# Altium PCB SimpleMonitorUSBAER.PCBDOC
Units mm, origin at the board's own origin, x right, y up, seen from the top; angles counter-clockwise.
Board outline 91.44 x 22.86 mm, 2 copper layers (Top Layer, Bottom Layer); 11 components, 29 nets, 122 pads, 24 vias.
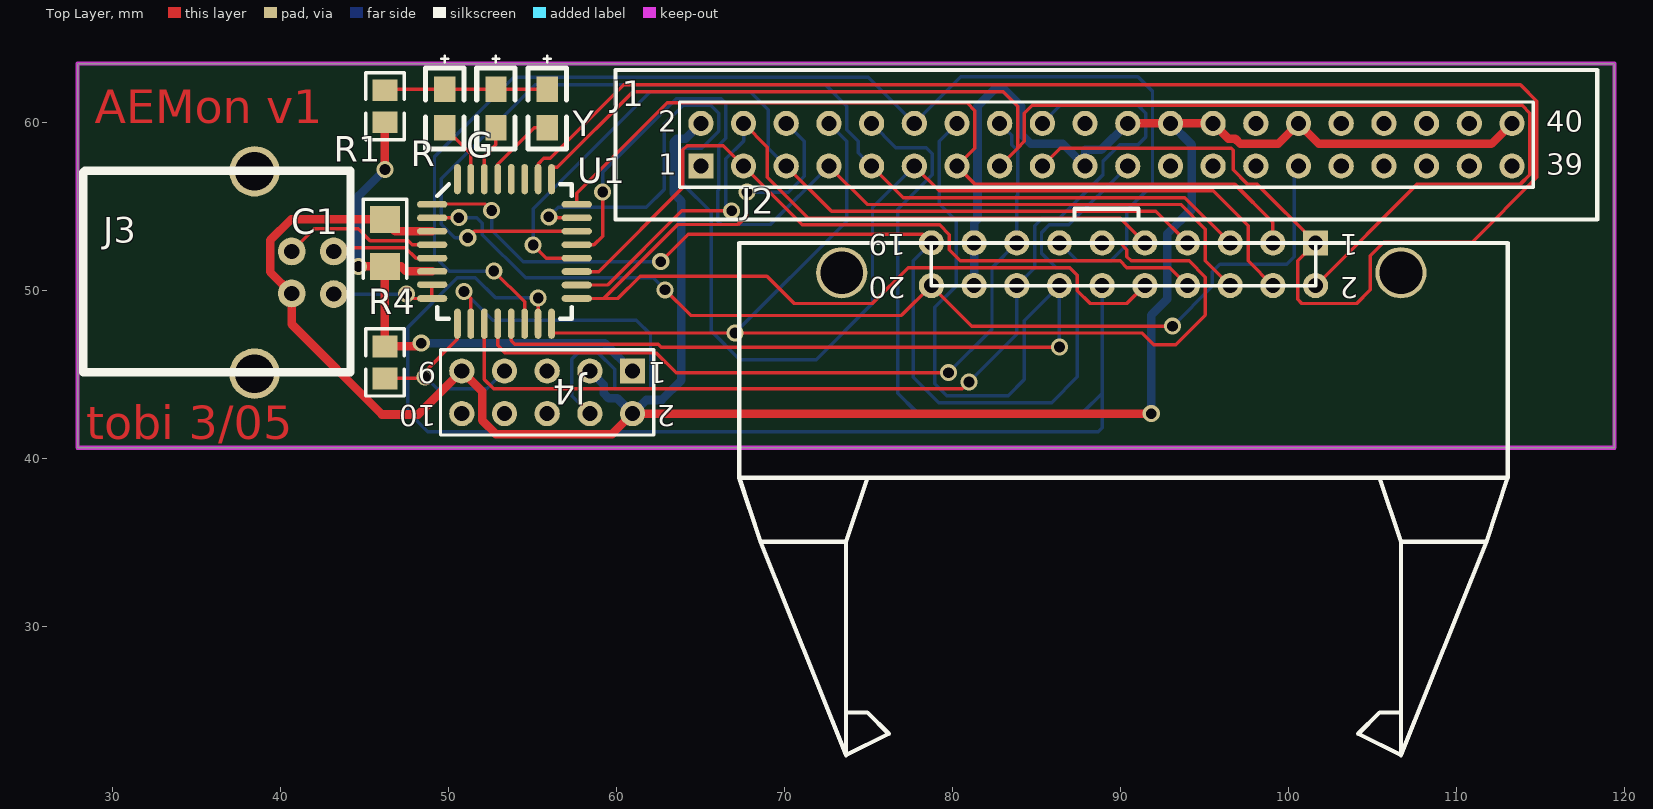
[diagram p0: Top Layer view]
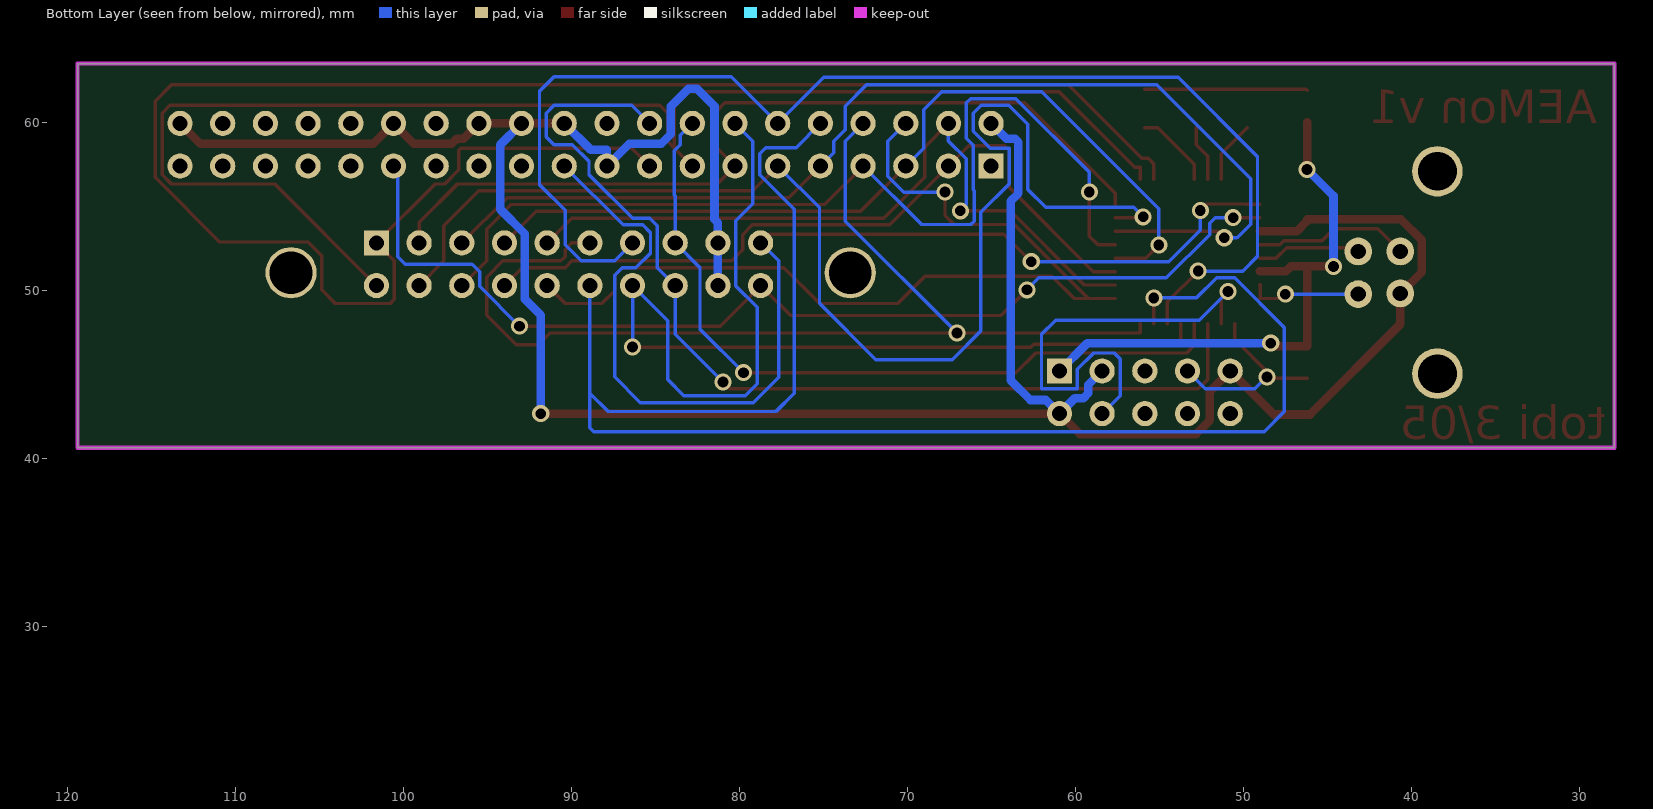
[diagram p1: Bottom Layer view, seen from below]

## Layer stack, top to bottom
Top Layer: signal copper 0.0356
Dielectric: dielectric 0.32, FR-4, Dk 4.8
Bottom Layer: signal copper 0.0356

## Board outline
27.94,40.64 27.94,63.5 119.38,63.5 119.38,40.64

## Design rules (kind name [scope] priority, off if disabled: settings)
Clearance [All] p1: gap=0.203
ComponentClearance [All] p1: gap=0.254 collisioncheckmode=0
PolygonConnect [All] p1: connectstyle=Relief reliefconductorwidth=0.254 reliefentries=4 polygonreliefangle="90 Angle"
RoomDefinition SimpleMonitorUSBAER [InComponentClass('SimpleMonitorUSBAER')] p1: confinementstyle=ConfineIn formatcopy=TRUE outline 0,0 142.24,0 142.24,96.774 0,96.774
RoutingLayers [All] p1: top layer=Horizontal bottom layer=Vertical
RoutingVias [All] p1: holewidth=0.635 width=1.016 viastyle="Through Hole" minholewidth=0.711 minwidth=1.27 maxholewidth=0.711 maxwidth=1.27
SolderMaskExpansion [All] p1: expansion=0.102
TestPointUsage [All] p1: valid=0 allowmultiple=FALSE
Testpoint [All] p1: side=15 testpointundercomponent=TRUE minsize=1.016 maxsize=2.54 preferedsize=1.524 minholesize=0 maxholesize=1.016 preferedholesize=0.813 testpointgrid=0.025 style=1023 order=-539222988
Width "Schematic Width Constraint" [InNet('VDD')] p1: maxlimit=1.524 minlimit=0.254 preferedwidth=0.508
Width "Schematic Width Constraint" [InNet('GND')] p2: maxlimit=1.524 minlimit=0.254 preferedwidth=0.508
Width [All] p3: maxlimit=0.203 minlimit=0.203 preferedwidth=0.203
16 further rules are at their usual default settings.

## Components (designator, comment, footprint, x,y, rotation, side; value= is the part's Value field where it differs from the comment)
C1 "100nF" CC3216-1206 46.228,52.832 r270 top
G "LED" 0805LED 55.88,61.976 r270 top
J1 "CAVIAR" "HDR2X20 with shell" 65.024,57.404 r0 top
J2 "AER-Rome" "HDR10x2 w/clips" 101.6,52.832 r180 top
J3 "USB B" usb 43.18,52.324 r270 top
J4 "Debug" HDR2X5 60.96,45.212 r180 top
R "LED" 0805LED 49.784,61.976 r270 top
R1 "471" CR2012-0805 46.228,60.96 r90 top
R4 "102" CR2012-0805 46.228,45.72 r270 top
U1 "C8051F320" TQFP32 53.34,52.324 r0 top
Y "LED" 0805LED 52.832,61.976 r270 top

## Footprints (in the part's own frame and the unit in brackets; to place one, negate y for a bottom-side part, rotate by r counter-clockwise, add the part's x,y. Pads: shape width x height; smd on the part's side, far side on the other; paste and mask are expansions set on the pad)
0805LED [mil]
  rect 60x50 smd: +(0,0) -(90,0)
  silkscreen extent -79,-45 140,45
CC3216-1206 [mm]
  rect 1.6x1.8 smd: 1(-1.4,0) 2(1.4,0)
  silkscreen extent -2.6,-1.3 2.1,1.3
CR2012-0805 [mm]
  rect 1.3x1.5 smd: 1(-0.95,0) 2(0.95,0)
  silkscreen extent -2,-1.15 2,1.15
HDR2X5 [mm] "Connector; Header; 5x2 Position"
  rect 1.5x1.5 hole 0.9: 1(0,0)
  round 1.5 hole 0.9: 2(0,2.54) 3(2.54,0) 4(2.54,2.54) 5(5.08,0) 6(5.08,2.54) 7(7.62,0) 8(7.62,2.54) 9(10.16,0) 10(10.16,2.54)
  silkscreen extent -1.27,-1.27 11.43,3.81
"HDR2X20 with shell" [mm] "IDC 40 with PCB plastic shell"
  rect 1.5x1.5 hole 0.9: 1(0,0)
  round 1.5 hole 0.9: 2(0,2.54) 3(2.54,0) 4(2.54,2.54) 5(5.08,0) 6(5.08,2.54) 7(7.62,0) 8(7.62,2.54) 9(10.16,0) 10(10.16,2.54) 11(12.7,0) 12(12.7,2.54) 13(15.24,0) 14(15.24,2.54) 15(17.78,0) 16(17.78,2.54) 17(20.32,0) 18(20.32,2.54) 19(22.86,0) 20(22.86,2.54) 21(25.4,0) 22(25.4,2.54) 23(27.94,0) 24(27.94,2.54) 25(30.48,0) 26(30.48,2.54) 27(33.02,0) 28(33.02,2.54) 29(35.56,0) 30(35.56,2.54) 31(38.1,0) 32(38.1,2.54) 33(40.64,0) 34(40.64,2.54) 35(43.18,0) 36(43.18,2.54) 37(45.72,0) 38(45.72,2.54) 39(48.26,0) 40(48.26,2.54)
  silkscreen extent -5.08,-3.17 53.34,5.71
"HDR10x2 w/clips" [mm] "10x2 IDC header with clips"
  rect 1.5x1.5 hole 0.9: 1(0,0)
  round 1.5 hole 0.9: 2(0,2.54) 3(2.54,0) 4(2.54,2.54) 5(5.08,0) 6(5.08,2.54) 7(7.62,0) 8(7.62,2.54) 9(10.16,0) 10(10.16,2.54) 11(12.7,0) 12(12.7,2.54) 13(15.24,0) 14(15.24,2.54) 15(17.78,0) 16(17.78,2.54) 17(20.32,0) 18(20.32,2.54) 19(22.86,0) 20(22.86,2.54)
  round 3.048 hole 2.54: ""(-5.08,1.778) ""(28.194,1.778)
  silkscreen extent -11.43,0 34.29,30.48
TQFP32 [mm]
  oval 1.8x0.4 smd: 1(-4.3,2.8) 2(-4.3,2) 3(-4.3,1.2) 4(-4.3,0.4) 5(-4.3,-0.4) 6(-4.3,-1.188) 7(-4.3,-1.975) 8(-4.3,-2.8) 17(4.3,-2.8) 18(4.3,-2) 19(4.3,-1.2) 20(4.3,-0.4) 21(4.3,0.4) 22(4.3,1.2) 23(4.3,2) 24(4.3,2.8)
  oval 0.4x1.8 smd: 9(-2.8,-4.3) 10(-2,-4.3) 11(-1.2,-4.3) 12(-0.4,-4.3) 13(0.4,-4.3) 14(1.2,-4.3) 15(2,-4.3) 16(2.8,-4.3) 25(2.8,4.3) 26(2,4.3) 27(1.2,4.3) 28(0.4,4.3) 29(-0.4,4.3) 30(-1.2,4.3) 31(-2,4.3) 32(-2.8,4.3)
  silkscreen extent -4,-4 4,4
usb [mm]
  round 1.651 hole 0.9: 1(2.54,0) 2(0,0) 3(0,-2.5) 4(2.5,-2.5)
  round 3 hole 2.3: 5(-4.77,-4.71) 5(7.27,-4.71)
  silkscreen extent -4.8,-14.9 7.2,1

## Part data
C1: library part CAPCHIP
G R Y: "LED, SMT 3mm by 1.5mm"
J1: library part "CAVIAR 40 IDC", "CAVIAR 40 pin IDC header"
J2: library part "Header AER-ROME", "AER-Rome 20-Pin, Dual row, with IDC mounting clips"
J3: library part USB, "USB TypB"
J4: library part "Header 5X2", "Header, 5-Pin, Dual row"
R1 R4: library part RES1
U1: "Silicon Labs USB Microcontroller"

## Via types
v1: diameter 1.016, hole 0.635, Top Layer to Bottom Layer, 24 vias

## Nets (pads, with @x,y where several pads share a name; then routed paths per layer and width w, separated by ;. In a path a pad name is that pad's centre, name@x,y a point inside that pad or via, vN(x,y) a via of type N, cw(c..) or ccw(c..) an arc to the next point about the centre after c; other vN are vias at no path point)
/RST/C2CK: J4.7 R4.2 U1.9 | length 12.1
  Top Layer w0.203: R4.2 v1@48.224,44.77 ; v1(48.616,44.856) 48.529,44.77 v1@48.224,44.77 ; U1.9 50.54,47.086 48.463,45.009 v1@48.224,44.77
  Bottom Layer w0.203: v1(48.616,44.856) 49.327,44.145 52.273,44.145 J4.7
ACK: J1.29 J2.20 U1.2 | length 63.7
  Top Layer w0.203: U1.2 50.616,54.324 v1(50.622,54.331) ; v1(62.89,50.038) 64.414,48.514 76.962,48.514 J2.20 81.153,47.879 v1(93.091,47.879)
  Bottom Layer w0.203: v1(50.622,54.331) 51.689,54.331 52.019,54 52.019,53.327 54.597,50.749 62.179,50.749 v1(62.89,50.038) ; v1(93.091,47.879) 95.453,50.241 95.453,51.105 95.91,51.562 99.873,51.562 100.33,52.019 100.33,57.404 J1.29
AE0: J1.17 J2.1 U1.26 | length 109.3
  Top Layer w0.203: U1.26 55.34,57.524 55.677,57.861 56.058,57.861 60.427,62.23 113.792,62.23 114.757,61.265 114.757,56.728 110.912,52.883 105.664,52.883 104.851,52.07 104.851,50.038 104.038,49.225 100.787,49.225 100.533,49.479 100.533,51.765 J2.1 98.095,56.337 97.536,56.337 96.698,57.175 96.698,58.344 96.571,58.471 86.411,58.471 J1.17
AE1: J1.15 J2.2 U1.25 | length 86.5
  Top Layer w0.203: U1.25 56.14,57.328 56.49,57.328 60.985,61.824 83.007,61.824 83.871,60.96 83.871,58.471 ; J1.15 83.871,58.471 ; J2.2 107.645,56.337 113.792,56.337 114.351,56.896 114.351,60.554 113.894,61.011 84.734,61.011 84.277,60.554 84.277,58.877 83.871,58.471
AE2: J1.13 J2.3 U1.24 | length 51.9
  Top Layer w0.203: U1.24 57.633,55.124 57.633,55.778 63.017,61.163 80.874,61.163 81.331,60.706 81.331,58.471 J1.13 81.331,56.337 96.774,56.337 99.06,54.051 J2.3
AE3: J1.11 J2.4 U1.23 | length 78.6
  Top Layer w0.203: v1(55.982,54.381) 56.039,54.324 U1.23 ; J1.11 79.197,55.931 95.504,55.931 97.587,53.848 97.587,51.765 J2.4
  Bottom Layer w0.203: v1(55.982,54.381) 56.54,54.94 61.773,54.94 62.84,56.007 62.84,59.881 63.969,61.011 65.622,61.011 66.091,60.542 66.091,59.487 65.075,58.471 63.957,58.471 63.957,56.337 65.634,54.661 65.634,47.588 67.349,45.872 71.882,45.872 75.235,49.225 75.235,54.915 J1.11
AE4: J1.9 J2.5 U1.22 | length 65.6
  Top Layer w0.203: v1(51.156,53.137) 51.543,53.524 U1.22 ; J1.9 77.064,55.524 93.828,55.524 J2.5
  Bottom Layer w0.203: v1(51.156,53.137) 50.394,53.137 49.581,53.95 49.581,56.642 55.169,62.23 72.441,62.23 73.711,60.96 73.711,59.563 74.397,58.877 74.397,58.191 J1.9
AE5: J1.7 J2.6 U1.21 | length 58.1
  Top Layer w0.203: U1.21 58.668,52.724 59.182,53.238 v1(59.182,55.855) ; J1.7 74.93,55.118 93.574,55.118 95.047,53.645 95.047,51.765 J2.6
  Bottom Layer w0.203: v1(59.182,55.855) 59.182,57.048 63.551,61.417 66.243,61.417 66.497,61.163 66.497,59.055 66.091,58.649 66.091,55.982 66.04,55.931 66.04,54.127 66.243,53.924 69.164,53.924 J1.7
AE6: J1.5 J2.7 U1.20 | length 52
  Top Layer w0.203: v1(55.042,52.705) 55.823,51.924 U1.20 ; J1.5 72.796,54.712 92.1,54.712 J2.7
  Bottom Layer w0.203: v1(55.042,52.705) 55.042,54.864 62.001,61.824 67.97,61.824 69.037,60.757 69.037,58.471 J1.5
AE7: J1.3 J2.8 U1.19 | length 44.7
  Top Layer w0.203: U1.19 58.953,51.124 63.957,56.128 63.957,58.369 64.211,58.623 66.345,58.623 J1.3 71.069,53.899 79.236,53.899 79.807,53.328 79.807,52.426 80.467,51.765 89.967,51.765 90.373,51.359 92.913,51.359 J2.8
AE8: J1.4 J2.9 U1.18 | length 44.7
  Top Layer w0.203: U1.18 59.468,50.324 63.881,54.737 v1(66.853,54.737) ; J1.4 68.986,58.522 68.986,56.744 71.425,54.305 89.967,54.305 J2.9
  Bottom Layer w0.203: v1(66.853,54.737) 66.497,55.093 66.497,57.829 67.564,58.896 J1.4
AE9: J1.6 J2.10 U1.17 | length 57.1
  Top Layer w0.203: U1.17 59.252,49.524 ; v1(67.767,55.855) 67.767,54.458 67.234,53.924 63.652,53.924 59.252,49.524 ; J2.10 90.373,49.225 88.189,49.225 87.427,49.987 87.427,50.902 86.97,51.359 77.368,51.359 75.235,49.225 70.587,49.225 68.961,50.851 61.417,50.851 60.09,49.524 59.252,49.524
  Bottom Layer w0.203: v1(67.767,55.855) 70.231,55.855 71.171,56.794 71.171,58.877 J1.6
AE10: J1.8 J2.11 U1.16 | length 65.6
  Top Layer w0.203: U1.16 56.14,47.473 v1(67.056,47.473) 91.262,47.473 91.973,46.761 93.269,46.761 95.047,48.539 95.047,50.8 94.082,51.765 90.627,51.765 90.373,52.019 90.373,52.426 89.967,52.832 J2.11
  Bottom Layer w0.203: v1(67.056,47.473) 73.711,54.127 73.711,58.877 J1.8
AE11: J1.10 J2.12 U1.15 | length 98.9
  Top Layer w0.203: U1.15 v1(55.34,49.555)
  Bottom Layer w0.203: v1(55.34,49.555) 52.807,49.555 51.613,50.749 50.527,50.749 47.574,47.796 47.574,42.799 48.768,41.605 88.671,41.605 88.9,41.834 88.9,43.891 ; J1.10 76.632,58.496 78.435,58.496 78.791,58.141 78.791,56.896 76.733,54.839 76.733,43.891 77.826,42.799 87.808,42.799 88.9,43.891 ; J2.12 88.9,43.891
AE12: J1.12 J2.13 U1.14 | length 75.6
  Top Layer w0.203: v1(52.705,51.156) 54.54,49.321 U1.14
  Bottom Layer w0.203: v1(52.705,51.156) 50.063,51.156 49.174,52.045 49.174,57.963 53.899,62.687 74.981,62.687 J1.12 80.493,62.713 91.034,62.713 91.897,61.849 91.897,56.286 90.373,54.762 90.373,52.73 89.408,51.765 87.427,51.765 J2.13
AE13: J1.14 J2.14 U1.13 | length 66.8
  Top Layer w0.203: U1.13 53.74,47.022 53.95,46.812 62.484,46.812 62.662,46.634 v1(86.36,46.634)
  Bottom Layer w0.203: J1.14 79.197,58.877 79.197,55.169 80.213,54.153 80.213,50.267 78.943,48.997 78.943,44.45 79.654,43.739 83.312,43.739 84.277,44.704 84.277,48.209 J2.14 v1(86.36,46.634)
AE14: J1.16 J2.15 U1.12 | length 45.8
  Top Layer w0.203: U1.12 52.94,46.736 53.397,46.279 62.382,46.279 63.551,45.11 v1(79.756,45.11)
  Bottom Layer w0.203: v1(79.756,45.11) 82.347,47.701 82.347,51.359 J2.15 83.82,55.626 83.871,55.677 83.871,58.318 83.515,58.674 83.515,59.233 J1.16
AE15: J1.18 J2.16 U1.11 | length 60.9
  Top Layer w0.203: U1.11 52.14,44.704 52.699,44.145 80.569,44.145 v1(80.975,44.552)
  Bottom Layer w0.203: v1(80.975,44.552) 83.82,47.396 J2.16 84.887,51.359 84.887,53.848 85.344,54.305 86.36,54.305 88.951,56.896 88.951,57.681 89.944,58.674 91.034,58.674 91.491,59.131 91.491,60.554 91.034,61.011 86.411,61.011 J1.18
C2D: J4.4 U1.10 | length 27.6
  Top Layer w0.203: v1(50.934,49.936) 51.34,49.53 U1.10
  Bottom Layer w0.203: v1(50.934,49.936) 52.635,48.235 61.189,48.235 62.027,47.396 62.027,44.145 59.893,44.145 59.893,45.314 58.928,46.279 57.709,46.279 57.353,45.923 57.353,43.739 J4.4
D+: J3.3 U1.4 | length 9.3
  Top Layer w0.203: J3.3 42.026,53.67 44.628,53.67 45.339,52.959 47.625,52.959 47.86,52.724 U1.4
D-: J3.2 U1.5 | length 6.2
  Top Layer w0.203: J3.2 43.409,52.553 47.447,52.553 48.076,51.924 U1.5
GND: C1.1 J1.2 J1.19 J1.22 J1.24 J1.26 J1.30 J1.40 J2.17 J2.18 J3.4 J4.2 J4.3 J4.9 U1.3 | length 165.9
  Top Layer w0.508: U1.3 46.831,53.524 46.228,54.127 C1.1 40.64,54.232 39.395,52.987 39.395,51.109 J3.4 40.68,47.991 46.05,42.621 48.209,42.621 J4.9 52.019,43.993 52.019,42.266 52.832,41.453 59.741,41.453 J4.2 v1(91.821,42.672) ; J1.22 J1.24 J1.26 96.418,59.03 96.825,59.03 97.13,58.725 99.365,58.725 J1.30 101.803,58.725 112.065,58.725 J1.40
  Bottom Layer w0.508: J4.3 59.233,44.399 59.233,43.891 59.538,43.586 60.046,43.586 J4.2 61.773,43.485 62.687,43.485 63.856,44.653 63.856,55.321 63.398,55.778 63.398,58.826 63.602,59.03 64.11,59.03 J1.2 ; J2.18 J2.17 81.28,54.026 81.483,54.229 81.483,60.96 82.525,62.001 83.033,62.001 84.074,60.96 84.074,59.309 84.658,58.725 86.563,58.725 J1.19 87.884,58.369 88.849,58.369 J1.22 ; v1(91.821,42.672) 91.821,48.539 92.761,49.479 92.761,53.365 94.234,54.839 94.234,58.674 J1.24
NetG_+: G.+ R1.2 R.+ Y.+ | length 9.7
  Top Layer w0.203: R1.2 46.294,61.976 R.+ Y.+ G.+
NetG_-: G.- U1.29 | length 4.7
  Top Layer w0.203: U1.29 52.94,57.512 55.118,59.69 G.-
NetR_-: R.- U1.31 | length 3.7
  Top Layer w0.203: R.- 51.34,58.134 U1.31
NetU1_30: U1.30 Y.- | length 3.4
  Top Layer w0.203: U1.30 52.14,57.982 52.832,58.674 Y.-
REQ: J1.21 J2.19 U1.1 | length 68.9
  Top Layer w0.203: U1.1 49.809,55.124 49.809,55.143 52.197,55.143 v1(52.578,54.762) ; v1(62.636,51.714) 64.262,53.34 78.232,53.34 J2.19
  Bottom Layer w0.203: v1(52.578,54.762) 52.578,53.594 54.458,51.714 v1(62.636,51.714) ; J2.19 77.673,51.765 77.673,44.831 79.172,43.332 85.903,43.332 87.427,44.856 87.427,50.902 86.97,51.359 86.157,51.359 85.293,52.222 85.293,53.442 85.75,53.899 86.919,53.899 J1.21
VBUS: J3.1 U1.7 U1.8 | length 6.8
  Top Layer w0.203: v1(47.517,49.784) 47.777,49.524 U1.8@49.022,49.524 ; U1.8 U1.8@49.022,49.524 ; U1.7 49.022,50.349 U1.8@49.022,49.524
  Bottom Layer w0.203: J3.1 v1(47.517,49.784)
VDD: C1.2 J4.1 R1.1 R4.1 U1.6 | length 34
  Top Layer w0.508: v1(44.653,51.432) C1.2 ; v1(46.228,57.201) R1.1 ; v1(48.387,46.863) 48.194,46.67 R4.1 C1.2 ; U1.6 47.492,51.136 47.196,51.432 C1.2
  Bottom Layer w0.508: v1(44.653,51.432) 44.653,55.626 v1(46.228,57.201) ; v1(48.387,46.863) 59.309,46.863 J4.1
pads on no net: J1.1 J1.20 J1.23 J1.25 J1.27 J1.28 J1.31 J1.32 J1.33 J1.34 J1.35 J1.36 J1.37 J1.38 J1.39 J2. J3.5 J4.5 J4.6 J4.8 J4.10 U1.27 U1.28 U1.32

## Keep-outs
Keep-Out Layer:
  the board outline again, w0.254

## Other copper
Top Layer:
  text "AEMon v1" at 28.956,59.944 h2
  text "tobi 3/05" at 28.448,41.148 h2

## Silkscreen, mask and mechanical layers (free items; w line width, h text height)
Drill Drawing:
  text ".LEGEND" at 130.81,33.02 h1.52
  text "Drill Drawing." at 130.81,29.21 h1.52

## Dimensions
27.94,40.64 to 119.38,40.64 on Mechanical 1
27.94,40.64 to 27.94,63.5 on Mechanical 1

## Text inside footprints (layer, text, board x,y; h text height)
J1: Top Overlay "39" at 115.316,56.896 h1.27; Top Overlay "40" at 115.316,59.436 h1.27; Top Overlay "2" at 62.484,59.436 h1.27; Top Overlay "1" at 62.484,56.896 h1.27
J2: Top Overlay "20" at 77.216,50.8 h1.27 r180; Top Overlay "19" at 77.216,53.34 h1.27 r180; Top Overlay "1" at 104.14,53.34 h1.27 r180; Top Overlay "2" at 104.14,50.8 h1.27 r180
J4: Top Overlay "2" at 63.5,43.18 h1.27 r180; Top Overlay "1" at 62.992,45.72 h1.27 r180; Top Overlay "9" at 49.276,45.72 h1.27 r180; Top Overlay "10" at 49.276,43.18 h1.27 r180